# Altium PCB PCB4.PcbDoc
Units mil, origin at the board's own origin, x right, y up, seen from the top; angles counter-clockwise.
Board outline 6000 x 4000 mil, 2 copper layers (Top Layer, Bottom Layer); 22 components, 22 nets, 87 pads, 35 vias.
Unrouted connection lines stored in the file: 3.
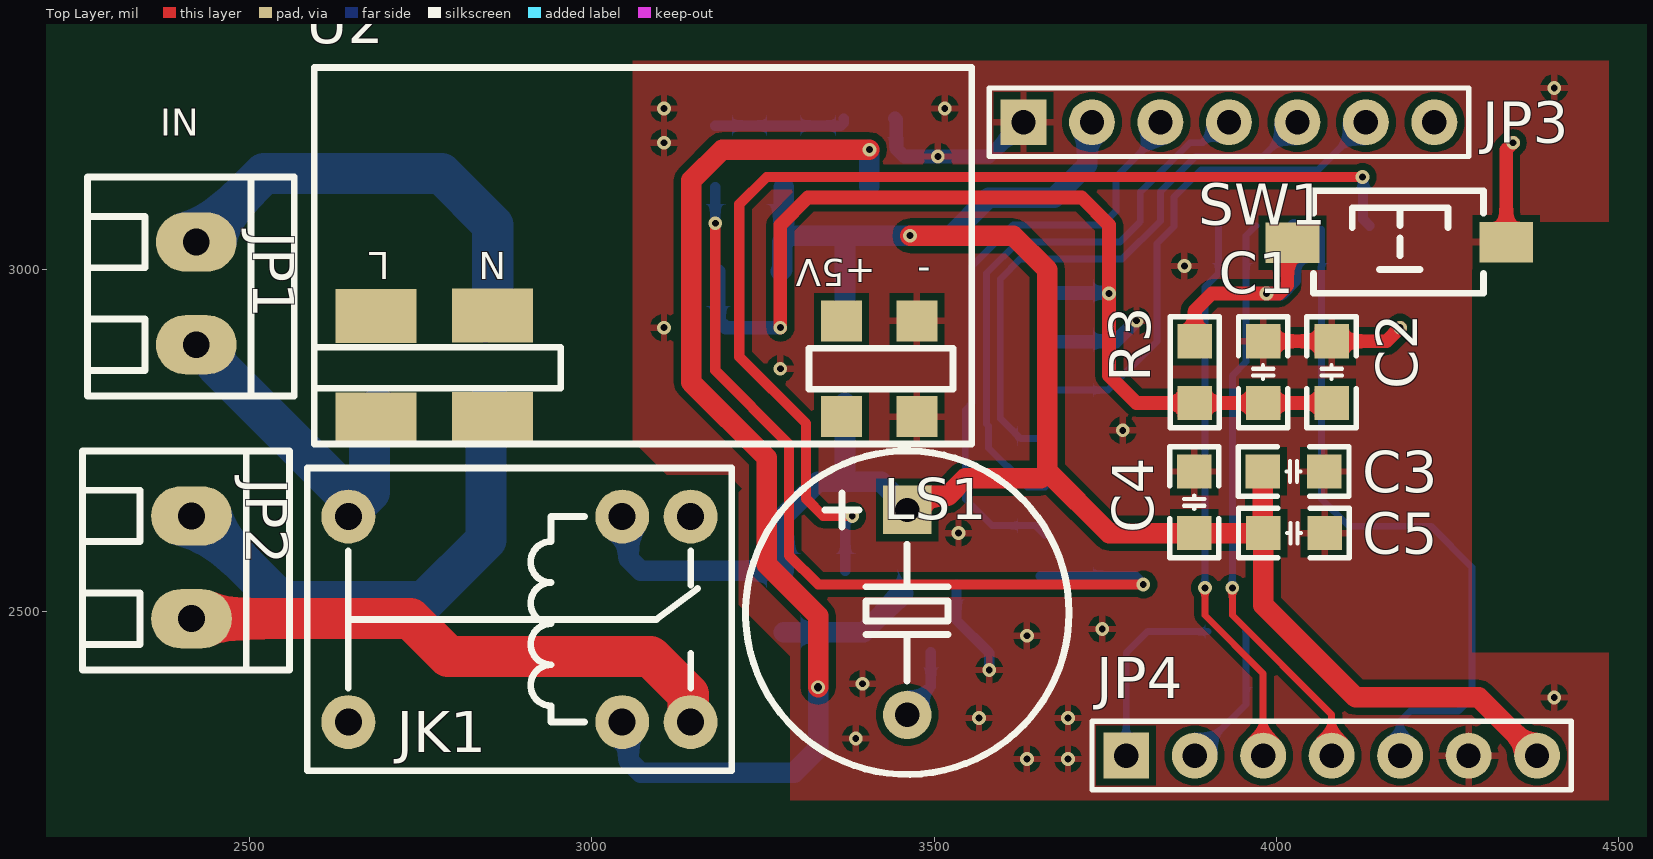
[diagram p0: Top Layer view]
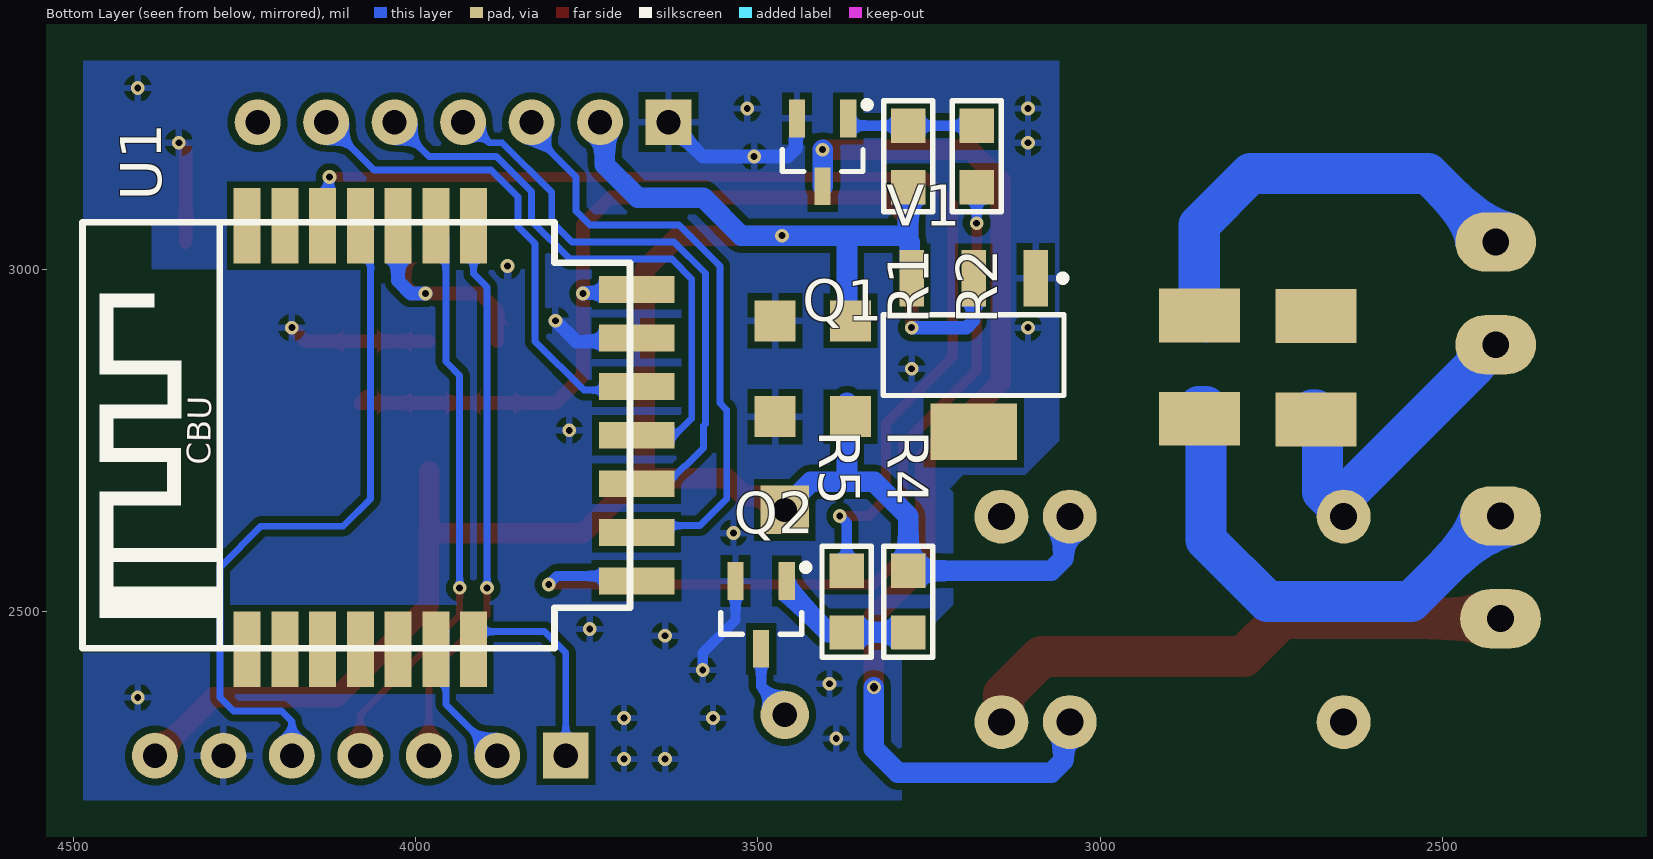
[diagram p1: Bottom Layer view, seen from below]

## Layer stack, top to bottom
Top Solder: solder mask 0.4, Solder Resist, Dk 3.5
Top Layer: signal copper 1.4
Dielectric 1: dielectric 12.6, FR-4, Dk 4.8
Bottom Layer: signal copper 1.4
Bottom Solder: solder mask 0.4, Solder Resist, Dk 3.5

## Board outline
1000,1000 7000,1000 7000,5000 1000,5000

## Design rules (kind name [scope] priority, off if disabled: settings)
Clearance [All] p1: gap=10 ignorepadtopadclearanceinfootprint=FALSE except(0: Arc-Hole Track-Hole SMDPad-Hole THPad-Hole Via-Hole Fill-Hole Poly-Hole Region-Hole Text-Hole)
PolygonConnect [All] p1: connectstyle=Relief reliefconductorwidth=10 reliefentries=4 polygonreliefangle="90 Angle" airgapwidth=10
RoutingVias [All] p1: holewidth=28 width=50 viastyle="Through Hole" minholewidth=28 minwidth=50 maxholewidth=28 maxwidth=50
SolderMaskExpansion [All] p1: expansion=4 istentingtop=FALSE
Width [All] p1: maxlimit=60 minlimit=10 preferedwidth=10 minimp=50.000000 maximp=50.000000 favimp=50.000000
30 further rules are at their usual default settings.

## Components (designator, comment, footprint, x,y, rotation, side; value= is the part's Value field where it differs from the comment)
C1 "104" "C 0805_M" 3980.65,2850.04 r270 top
C2 "104" "C 0805_M" 4080.65,2850.04 r270 top
C3 "104" "C 0805_M" 4025,2705.04 r0 top
C4 "104" "C 0805_M" 3880,2660 r90 top
C5 "104" "C 0805_M" 4025.65,2615.03 r0 top
JK1 "HK4100F-DC5V-SHG" HK4100F 2894.66,2489.02 r180 top locked
JP1 "HDR-1X2" KF128-3.81-2P 2422.64,2965.03 r270 top
JP2 "HDR-1X2" KF128-3.81-2P 2415.65,2565.03 r270 top
JP3 "HDR-1X7" HDR2.54-M-LI-7P 3930.65,3215.03 r0 top
JP4 "HDR-1X7" HDR2.54-M-LI-7P 4080.65,2290.03 r0 top
LS1 "DC5V" "BEEP 7.6X12X7.5" 3460.5,2498.76 r180 top
Q1 "SS8050" SOT23-3M 3405.65,3220.61 r0 bottom
Q2 "SS8050" SOT23-3M 3495.37,2545.03 r0 bottom
R1 "1K" "R 0805_M" 3280.65,3165.03 r270 bottom
R2 "1K" "R 0805_M" 3180.65,3165.03 r90 bottom
R3 "1K" "R 0805_M" 3880.65,2850.04 r90 top
R4 "1K" "R 0805_M" 3280.51,2515.03 r90 bottom
R5 "1K" "R 0805_M" 3370.52,2515.03 r270 bottom
SW1 "3x6x5" "TSW SMD-3*6*2.5" 4180.65,3040.03 r0 top
U1 "CBU Wi-Fi&Bluetooth 模组" "CBU WIFI&BLUETOOTH" 3677.39,2757.9 r90 bottom
U2 "WX-DC12003" WX-DC12003 3555,2795 r180 top
V1 "AMS1117-3V3" SOT223_L 3185,2875 r270 bottom

## Footprints (in the part's own frame and the unit in brackets; to place one, negate y for a bottom-side part, rotate by r counter-clockwise, add the part's x,y. Pads: shape width x height; smd on the part's side, far side on the other; paste and mask are expansions set on the pad)
"BEEP 7.6X12X7.5" [mm] "6.5*12*7.5mm(脚距,直径,高度)"
  rect 1.8x1.8 hole 0.9: 1(-0.011,-3.811)
  round 1.8 hole 0.9: 2(-0.011,3.789)
  silkscreen extent -6.01,-6 5.99,6, body extent -6.01,-5.93 5.99,6.07, height 7.55
"C 0805_M" [mil] "无极性贴片电容"
  rect 50x50 smd: 1(-45,0) 2(45,0)
  silkscreen extent -81,-36 81,36, body extent -39,-24 39,24, height 20
"CBU WIFI&BLUETOOTH" [mm]
  rect 2.8x1 smd: 1(-7.947,14.446) 2(-7.947,13.046) 3(-7.947,11.646) 4(-7.947,10.246) 5(-7.947,8.846) 6(-7.947,7.446) 7(-7.947,6.046) 15(7.773,6.046) 16(7.773,7.446) 17(7.773,8.846) 18(7.773,10.246) 19(7.773,11.646) 20(7.773,13.046) 21(7.773,14.446)
  rect 1x2.8 smd: 8(-5.4,0) 9(-3.6,0) 10(-1.8,0) 11(0,0) 12(1.8,0) 13(3.6,0) 14(5.4,0)
  silkscreen extent -7.9,0.25 7.9,20.55
HDR2.54-M-LI-7P [mm] "排母，7脚"
  rect 1.7x1.7 hole 0.9: 1(-7.62,0)
  round 1.7 hole 0.9: 2(-5.08,0) 3(-2.54,0) 4(0,0) 5(2.54,0) 6(5.08,0) 7(7.62,0)
  silkscreen extent -8.89,-1.27 8.89,1.27, body extent -8.89,-1.27 8.89,1.27, height 8.5
HK4100F [mm] "单刀双投"
  round 2 hole 1: 1(-3.81,3.81) 2(-3.81,-3.81) 3(6.35,3.81) 3(6.35,-3.81) 4(-6.35,3.81) 5(-6.35,-3.81)
  silkscreen extent -7.87,-5.61 7.87,5.61, body extent -7.75,-5.5 7.75,5.5, height 12.2
KF128-3.81-2P [mm] "螺钉式接线端子，脚距3.81mm"
  oval 2.2x3 hole 1: 1(-1.905,0) 2(1.905,0)
  silkscreen extent -4.32,-4.04 3.81,3.63, body extent -4.31,-3.9 3.81,3.5, height 8.55
"R 0805_M" [mil] "1/8W贴片电阻"
  rect 50x50 smd: 1(-45,0) 2(45,0)
  silkscreen extent -81,-36 81,36, body extent -39,-25 39,25, height 20
SOT23-3M [mm] "3x1.3x1mm(长宽高)"
  rect 0.6x1.4 smd: 1(-0.95,0) 2(0.95,0) 3(0,2.514)
  silkscreen extent -1.78,-0.63 1.5,1.97, body extent -1.5,0.07 1.5,2.47, height 1.05
SOT223_L [mm] "SOT223, 4-Leads, Body 6.5x3.5mm, Pitch 2.3mm, Lead Span 7mm, IPC High Density"
  rect 2.1x0.9 smd: 1(-2.85,2.3) 2(-2.85,0) 3(-2.85,-2.3)
  rect 2.1x3.2 smd: 4(2.85,0)
  silkscreen extent -2.97,-3.35 1.5,3.42, body extent -1.85,-3.35 1.85,3.35, height 1.7
"TSW SMD-3*6*2.5" [mm] "3*6*2.5mm"
  rect 2x1.5 smd: 1(-3.996,-0.02) 2(3.937,0)
  silkscreen extent -3.21,-1.9 3.09,1.9, body extent -4,-1.88 4,1.62, height 2.59
WX-DC12003 [mil] "220V-5V"
  rect 60x60 all layers, no hole: 1(80,10) 1(80,-130) 2(190,10) 2(190,-130)
  rect 118.11x78.74 all layers, no hole: 3(700,-138) 3(700,13) 4(870,14) 4(870,-137)
  silkscreen extent 0,-500 960,50

## Part data
C1 C2 C3 C4 C5: library part C, "无极性贴片电容", BOM名称=无极性贴片电容, 学习资源=www.ooocke.com, 版权归属=源创客
JK1: library part HK4100F, "一组转换", BOM名称=一组继电器, 学习资源=www.ooocke.com, 版权归属=源创客
JP1 JP2: library part "Header 2", "2P接插件", BOM名称=2P接插件, 学习资源=www.ooocke.com, 版权归属=源创客
JP3 JP4: library part "Header 7", "7P接插件", BOM名称=7P接插件, 学习资源=www.ooocke.com, 版权归属=源创客
LS1: library part BEEP, "蜂鸣器", BOM名称=蜂鸣器, 学习资源=www.ooocke.com, 版权归属=源创客
Q1 Q2: library part 8050-SMD, "高频放大-NPN型", BOM名称=高频放大-NPN型, 学习资源=www.ooocke.com, 属性="40V 1.5A 1W 100MHZ", 版权归属=源创客
R1 R2 R3 R4 R5: library part R, "贴片电阻", BOM名称=贴片电阻, 学习资源=www.ooocke.com, 版权归属=源创客
SW1: library part "TSW 3x6", "3x6轻触开关", BOM名称=3x6轻触开关, 学习资源=www.ooocke.com, 版权归属=源创客
U1: library part CBU, BOM_Supplier=Tuya, Contributor=chenlf, spicePre=U, spiceSymbolName="CBU Wi-Fi&amp;Bluetooth 模组"
U2: "wx-DC12003 220V转5V模块"
V1: library part AMS1117, "三端稳压芯片", BOM名称=稳压芯片, 学习资源=www.ooocke.com, 版权归属=源创客

## Via types
v1: diameter 20, hole 10, Top Layer to Bottom Layer, 34 vias
v2: diameter 20, hole 12, Top Layer to Bottom Layer, 1 vias

## Nets (pads, with @x,y where several pads share a name; then routed paths per layer and width w, separated by ;. In a path a pad name is that pad's centre, name@x,y a point inside that pad or via, vN(x,y) a via of type N, cw(c..) or ccw(c..) an arc to the next point about the centre after c; other vN are vias at no path point)
3.3V: C1.2 C2.2 R3.1 U1.14 V1.2 | length 1499.1
  Top Layer w20: v1(3275.65,2915.03) 3275.65,3065.03 3315.65,3105.03 3715.65,3105.03 3755.65,3065.03 v1(3755.65,2965.03) 3755.65,2845.03 3795.64,2805.04 R3.1 C1.2 C2.2 C2.2@4070.66,2815.03
  Bottom Layer w20: V1.2@3185.65,2997.23 3185.65,2925.03 3195.65,2915.03 v1(3275.65,2915.03) ; U1.14@3661.91,2965.49 3755.19,2965.49 v1(3755.65,2965.03)
220V_L: JK1.3 JP1.2 U2.4 | length 526.3
  Bottom Layer w60: JP1.2 2431.19,2890.03 2451.7,2869.52 2451.7,2860.97 2641.08,2671.59 2641.08,2642.6 2644.66,2639.02 2644.66,2644.09 2675.65,2675.08 2675.65,2785.66 2685.02,2795.03 U2.4@2690.65,2795.03
220V_N: JP1.1 JP2.1 U2.3 | length 1413.4
  Bottom Layer w60: JP2.1@2405.65,2640.03 2421.4,2640.03 2546.4,2515.03 2755.65,2515.03 2845.65,2605.03 U2.3@2845.65,2800.03 ; JP1.1@2405.65,3040.03 2421.4,3040.03 2521.4,3140.03 2780.65,3140.03 2855.65,3065.03 U2.3@2855.65,2933 ; U2.3@2845,2791.37 2854.37,2782 U2.3@2855,2782 ; U2.3@2845,2923.63 2854.37,2933 U2.3@2855,2933 ; U2.3@2855.65,2800.03 U2.3@2860.65,2795.03
+5: C3.1 C4.1 C5.1 JK1.2 JP3.2 JP4.7 LS1.1 R1.2 R4.2 U2.2 V1.3 | length 3299.2
  Top Layer w30: LS1.1 3481.36,2669.23 3519.86,2669.23 3545.65,2695.03 3655.65,2695.03 3665.65,2705.03 ; v1(3465,3049.35) 3615.65,3049.35 3665.65,2999.35 3665.65,2705.03 ; C3.1 3980.33,2704.71 3980.33,2615.35 C5.1 3980.65,2510.03 4115.65,2375.03 4295.65,2375.03 JP4.7 ; C5.1@3980.64,2615.01 C4.1 3755.68,2615 3665.65,2705.03
  Bottom Layer w30: JK1.2 3053.99,2629.69 3053.99,2577.6 3071.56,2560.03 R4.2 3280.51,2639.88 3330.31,2689.69 3376.62,2689.69 ; V1.3@3276.2,2997.23 3278.43,2999.46 3278.43,3040.03 ; 3280.65,3040.03 3280.65,3049.35 ; R1.2 3280.65,3049.35 ; U2.2@3370,2805 3370,2696.3 3376.62,2689.69 ; U2.2@3370,2925 3370,3046.52 3372.83,3049.35 ; LS1.1 3440.49,2669.23 3440.49,2672.11 3422.92,2689.69 3376.62,2689.69 ; JP3.2 3723.59,3207.96 3723.59,3152.96 3675.65,3105.03 3580.03,3105.03 3524.35,3049.35 v1(3465,3049.35) 3372.83,3049.35 ; 3280.65,3049.35 3372.83,3049.35
Beep: R5.1 U1.19 | length 1634.4
  Top Layer w15: v1(3380.65,2640.03) 3338.15,2640.03 3313.15,2665.03 3313.15,2775.03 3215.65,2872.53 3215.65,3095.03 3255.65,3135.03 v1(4125.65,3135.03)
  Bottom Layer w15: R5.1 3370.52,2629.89 v1(3380.65,2640.03) ; v1(4125.65,3135.03) 4126.61,3134.07 4126.61,3073.19 U1.19
GND: C1.1 C2.1 C3.2 C4.2 C5.2 JP3.1 JP4.6 Q1.2 Q2.2 SW1.2 U1.13 U2.1 V1.1 | length 904.6
  Top Layer w20: C1.1 C2.1 4160.66,2895.04 v1(4180.65,2915.03) ; SW1.2 4335.65,3175.03 v1(4345.65,3185.03)
  Bottom Layer w15: Q2.2@3532.77,2540.03 3532.77,2487.91 3580.65,2440.03 v1(3580.65,2415.03)
  Bottom Layer w20: Q1.2 3444.87,3218.8 3444.87,3176.74 3456.58,3165.03 v1(3505.65,3165.03) 3580.65,3165.03 JP3.1 ; U1.13@3661.91,2894.63 3765.26,2894.63 v1(3795.65,2925.03)
  other v1: 3635.65,2285.03 3695.65,2285.03 3385.65,2315.03 3565.65,2345.03 3695.65,2345.03 4405.65,2375.03 3395.65,2395.03 3635.65,2465.03 3745.65,2475.03 3535.65,2615.03 3775.65,2765.03 3275.65,2855.03 3105.65,2915.03 3865.65,3005.03 3105.65,3185.03 3105.65,3235.03 3515.65,3235.03 4405.65,3265.03
KeyCtrl: R3.2 SW1.1 U1.17 | length 389.6
  Top Layer w20: R3.2 3880.65,2940.03 3905.65,2965.03 v1(3985.65,2965.03) 4003.94,2965.03 4015.65,2976.74 4015.65,3031.55 SW1.1 SW1.1@4022.95,3039.63
  Bottom Layer w20: v1(3985.65,2965.03) 4007.3,2965.03 4025.65,2983.38 U1.17
NetJK1_1: JK1.1 Q1.3 | length 1597.4
  Top Layer w30: v2(3330.65,2390.03) 3330.65,2494.06 3255.65,2569.06 3255.65,2725.03 3145.65,2835.03 3145.65,3130.03 3190.65,3175.03 v1(3405.65,3175.03)
  Bottom Layer w30: JK1.1 3053.99,2329.69 3053.99,2282.6 3071.56,2265.03 3295.65,2265.03 3330.65,2300.03 v2(3330.65,2390.03) ; Q1.3 v1(3405.65,3175.03)
NetJK1_4: JK1.4 JP2.2 | length 823.2
  Top Layer w60: JP2.2@2405.65,2490.03 2735.65,2490.03 2790.65,2435.03 3085.65,2435.03 3141.08,2379.6 3141.08,2342.6 JK1.4
NetLS1_2: LS1.2 Q2.3 | length 105.7
  Bottom Layer w15: LS1.2 3460.93,2356.55 3495.37,2390.99 Q2.3@3495.37,2441.05
NetQ1_1: Q1.1 R1.1 R2.2 | length 195.7
  Bottom Layer w15: R2.2 R1.1 3363.94,3210.03 3368.25,3214.34 Q1.1
NetQ2_1: Q2.1 R4.1 R5.2 | length 210.6
  Bottom Layer w15: Q2.1@3457.97,2527.47 Q2.1@3457.97,2540.03
  Bottom Layer w30: R4.1 R5.2 3397.34,2470.03 Q2.1@3454.78,2527.47
RealyCtrl: R2.1 U1.8 | length 1272.3
  Top Layer w15: v1(3180.65,3067.53) 3180.65,2852.53 3288.15,2745.03 3288.15,2582.53 3330.65,2540.03 v1(3805.65,2540.03)
  Bottom Layer w15: v1(3180.65,3067.53) R2.1 ; U1.8@3655.65,2552.43 3793.25,2552.43 v1(3805.65,2540.03)
RealyCtrl0: JP3.3 U1.9 | length 882.8
  Bottom Layer w10: U1.9@3661.91,2611.17 3647.23,2625.85 3584.83,2625.85 3545.65,2665.03 3545.65,2795.03 3555.65,2805.03 3555.65,3005.03 3615.65,3065.03 3745.65,3065.03 3765.65,3085.03 3765.65,3135.03 3830.65,3200.03 JP3.3
RealyCtrl1: JP3.4 U1.10 | length 833.7
  Bottom Layer w10: U1.10@3661.91,2682.03 3636.72,2682.03 3622.03,2696.72 3622.03,2698.25 3607.66,2712.63 3606.17,2712.63 3579.34,2739.46 3579.34,2771.76 3576.79,2774.3 3576.79,2994.45 3622.37,3040.03 3771.51,3040.03 3801.08,3069.6 3801.08,3112.63 3873.48,3185.03 3892.11,3185.03 3922.11,3215.03 JP3.4
RealyCtrl2: JP3.5 U1.11 | length 834.9
  Bottom Layer w10: U1.11@3661.91,2752.9 3626.48,2752.9 3596.79,2782.59 3596.79,2986.17 3625.65,3015.03 3774.8,3015.03 3830.65,3070.88 3830.65,3113.92 3881.76,3165.03 3980.65,3165.03 JP3.5
RealyCtrl3: JP3.6 U1.12 | length 739.5
  Bottom Layer w10: U1.12@3661.91,2823.77 3754.39,2823.77 3825.65,2895.03 3825.65,3037.6 3850.65,3062.6 3850.65,3105.63 3890.05,3145.03 4060.65,3145.03 JP3.6
RST: JP4.5 U1.18 | length 1014.9
  Bottom Layer w10: U1.18@4065.3,3058.91 4065.65,3058.55 4065.65,2665.03 4105.65,2625.03 4225.65,2625.03 4285.65,2565.03 4285.65,2375.03 4265.65,2355.03 4195.65,2355.03 4180.65,2340.03 JP4.5
RX1: JP4.4 U1.16 | length 848.4
  Top Layer w10: v1(3935.65,2535.03) 3935.65,2495.03 4080.65,2350.03 JP4.4
  Bottom Layer w10: v1(3935.65,2535.03) 3935.65,2845.03 3955.85,2865.22 3955.85,3049.22 U1.16
RX2: JP4.2 U1.6 | length 212.4
  Bottom Layer w10: JP4.2 3955.65,2365.03 3955.65,2470.55 U1.6@3955.06,2471.15
TX1: JP4.3 U1.15 | length 817.3
  Top Layer w10: v1(3895.65,2535.03) 3895.65,2495.03 3980.65,2410.03 JP4.3
  Bottom Layer w10: v1(3895.65,2535.03) 3895.65,2925.03 3895.65,2974.03 3915.42,2993.79 U1.15
TX2: JP4.1 U1.7 | length 282.2
  Bottom Layer w10: JP4.1 3780.65,2440.03 3811.77,2471.15 U1.7@3899.94,2471.15
pads on no net: JK1.5 JP3.7 U1.1 U1.2 U1.3 U1.4 U1.5 U1.20 U1.21 V1.4

## Polygon pours and split planes (outlines as drawn)
no net on Mechanical 1 "NONET_L01_P-001" (none): 2315.65,2225.03 4485.65,2225.03 4485.65,3305.03 2315.65,3305.03
GND on Top Layer "GND_L01_P002" (solid, pour order 2): 3060,3305 3060,2750 3110,2700 3200,2700 3220,2680 3215,2675 3215,2510 3290,2435 3290,2225 4485,2225 4485,2440 4285,2440 4285,3000 4385,3000 4385,3070 4485,3070 4485,3305 4420,3305
GND on Bottom Layer "GND_L02_P003" (solid, pour order 3): 3060,3305 3060,2750 3110,2700 3200,2700 3220,2680 3215,2675 3215,2510 3290,2435 3290,2225 4485,2225 4485,2440 4285,2440 4285,3000 4385,3000 4385,3070 4485,3070 4485,3305 4420,3305

## Silkscreen, mask and mechanical layers (free items; w line width, h text height)
Top Overlay:
  text "IN" at 2370,3195 h39.37
Mechanical 1:
  lines w20: 2315.65,2225.03 4370.93,2225.03 4485.65,2225.03 4485.65,3305.03 2315.65,3305.03 2315.65,2225.03
  lines w60: 2965.65,3235.03 3025.65,3175.03 3025.65,2815.03 2945.65,2735.03 2945.65,2555.03 2995.65,2505.03 3115.65,2505.03 3245.65,2375.03

## Text inside footprints (layer, text, board x,y; h text height)
U1: Bottom Overlay "CBU" at 4288.46,2714.12 h59.05 r271
U2: Top Overlay "L" at 2705,3025 h39.37 r180; Top Overlay "N" at 2875,3025 h39.37 r180; Top Overlay "-" at 3495,3014.68 h39.37 r180; Top Overlay "+5V" at 3415,3015 h39.37 r180